# Altium PCB ESC_GEMINI.PcbDoc (part 3 of 4)
Units mm, origin at the board's own origin, x right, y up, seen from the top; angles counter-clockwise.
Board outline 12 x 35 mm, 6 copper layers (F.Cu, In1.Cu, In2.Cu, In3.Cu, In4.Cu, B.Cu); 97 components, 64 nets, 285 pads, 618 vias.
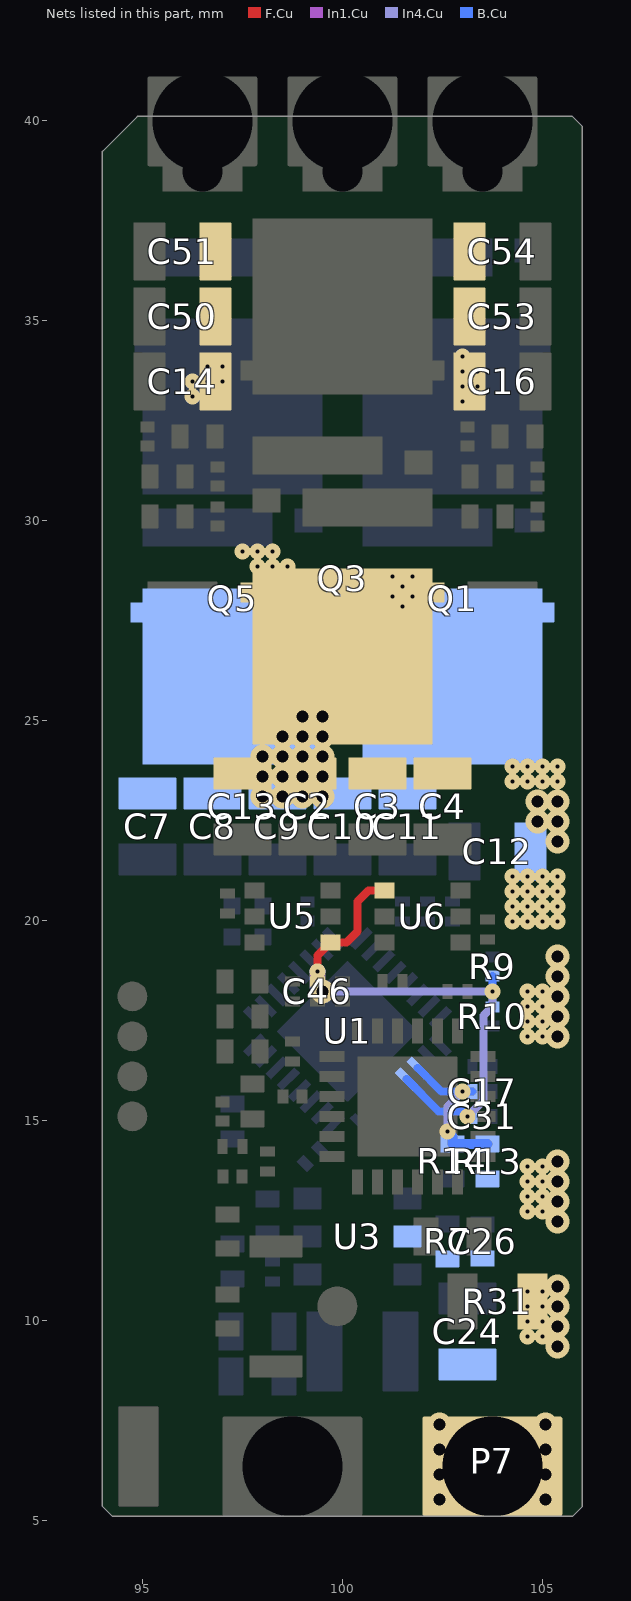
[diagram p7: the nets of this part, all layers, seen from the top]

## Via types
v1: diameter 0.4, hole 0.1, F.Cu to In1.Cu, tented both sides, 195 vias
v2: diameter 0.4, hole 0.1, In4.Cu to B.Cu, tented both sides, 187 vias
v3: diameter 0.6, hole 0.3, In1.Cu to In4.Cu, tented both sides, 159 vias
v4: diameter 0.6, hole 0.3, F.Cu to B.Cu, tented both sides, 77 vias

## Nets (pads, with @x,y where several pads share a name; then routed paths per layer and width w, separated by ;. In a path a pad name is that pad's centre, name@x,y a point inside that pad or via, vN(x,y) a via of type N, cw(c..) or ccw(c..) an arc to the next point about the centre after c; other vN are vias at no path point) (continued)
VBUS: C2.1 C3.1 C4.1 C7.1 C8.1 C9.1 C10.1 C11.1 C12.1 C13.1 C14.1 C16.1 C24.1 C26.1 C50.1 C51.1 C53.1 C54.1 P7.PAD Q1.D Q3.D Q5.D R7.1 R13.1 R31.2 U3.5
  other v1: 101.5,27.85 101.25,28.1 101.75,28.1 101.5,28.35 101.25,28.6 101.75,28.6 97.875,28.85 98.25,28.85 98.625,28.85 97.5,29.225 97.875,29.225 98.25,29.225 103,32.975 96.25,33.1 103,33.35 103.375,33.35 96.25,33.475 96.625,33.475 97,33.475 103,33.725 103.375,33.725 96.625,33.85 97,33.85 103,34.1
  other v2: 104.625,9.6 105,9.6 104.625,9.975 105,9.975 104.625,10.35 105,10.35 104.625,10.725 105,10.725 104.625,12.725 105,12.725 104.625,13.1 105,13.1 104.625,13.475 105,13.475 104.625,13.85 105,13.85 104.625,17.1 105,17.1 104.625,17.475 105,17.475 104.625,17.85 105,17.85 104.625,18.225 105,18.225 104.25,19.975 104.625,19.975 105,19.975 105.375,19.975 104.25,20.35 104.625,20.35 105,20.35 105.375,20.35 104.25,20.725 104.625,20.725 105,20.725 105.375,20.725 104.25,21.1 104.625,21.1 105,21.1 105.375,21.1 104.25,23.475 104.625,23.475 105,23.475 105.375,23.475 104.25,23.85 104.625,23.85 105,23.85 105.375,23.85
  other v3: 105.375,9.35 105.375,9.85 105.375,10.35 105.375,10.85 105.375,12.475 105.375,12.975 105.375,13.475 105.375,13.975 105.375,17.1 105.375,17.6 105.375,18.1 105.375,18.6 105.375,19.1 105.375,21.975 104.875,22.475 105.375,22.475 104.875,22.975 105.375,22.975
  other v4: 102.425,5.525 105.075,5.525 102.425,6.15 105.075,6.15 102.425,6.775 105.075,6.775 102.425,7.4 105.075,7.4 98,23.1 98.5,23.1 99,23.1 99.5,23.1 98,23.6 98.5,23.6 99,23.6 99.5,23.6 98,24.1 98.5,24.1 99,24.1 99.5,24.1 98.5,24.6 99,24.6 99.5,24.6 99,25.1 99.5,25.1
VBUS_SNS_U: C17.1 R13.2 R14.1 U1.11 | length 4
  In4.Cu w0.2: v2(102.625,14.725) 102.625,15.35 v2(103,15.725)
  B.Cu w0.2: U1.11@101.884,16.315 102.474,15.725 C17.1@103.25,15.725
  B.Cu w0.25: v2(102.625,14.725) 102.75,14.6 R14.1@102.75,14.413 R13.2@103.625,14.413
VREF_U: C31.1 C46.1 R9.2 R10.1 U1.12 U5.1 U6.1 | length 14.4
  F.Cu w0.2: C46.1@99.375,18.475 v1(99.375,18.725) 99.375,19.125 U5.1@99.7,19.45 100.1,19.45 100.375,19.725 100.375,20.475 100.65,20.75 U6.1@101.05,20.75
  In1.Cu w0.4: v1(99.375,18.725) 99.375,18.35 v3(99.5,18.225)
  In4.Cu w0.2: v3(99.5,18.225) v2(103.75,18.225) 103.75,17.85 103.525,17.625 103.525,15.5 v2(103.125,15.1)
  B.Cu w0.2: U1.12@101.601,16.032 102.408,15.225 103,15.225 v2(103.125,15.1) C31.1@103.25,15.1 ; R10.1@103.75,17.838 R9.2@103.75,18.613

## Polygon pours and split planes (outlines as drawn)
PHC on F.Cu "F.Cu-/CTRL/PHC-3" (solid, remove dead copper, pour order 30126): 105.5,37.85 105.75,38.1 105.75,39.35 105,40.1 102,40.1 101.875,39.975 101.875,38.1 102.125,37.85
PHA on F.Cu "F.Cu-/CTRL/PHA-2" (solid, remove dead copper, pour order 30113): 94.5,37.85 94.25,38.1 94.25,39.35 95,40.1 98,40.1 98.125,39.975 98.125,38.1 97.875,37.85
VBUS on F.Cu "F.Cu-VBUS-4" (solid, remove dead copper, pour order 30099): 97.875,22.85 99.625,22.85 99.75,22.975 99.75,25.225 99.625,25.35 98.875,25.35 97.75,24.225 97.75,22.975
GND on F.Cu "F.Cu-GND-3" (solid, remove dead copper, pour order 30065): 97.625,32.6 97.75,32.725 100.875,32.725 101.25,32.35 101,32.1 101,31.225 100.875,31.1 97.75,31.1 97.625,31.225
VBUS on F.Cu "F.Cu-VBUS-3" (solid, remove dead copper, pour order 30098): 97.25,37.35 97.125,37.475 96.375,37.475 96.25,37.35 96.25,33.6 96,33.35 96,32.975 96.25,32.725 97.125,32.725 97.25,32.85
PHA on F.Cu "F.Cu-/CTRL/PHA-1" (solid, remove dead copper, pour order 30243): 96.927,30.763 97.009,30.761 97.068,30.755 97.117,30.743 97.173,30.722 97.248,30.69 97.326,30.875 97.248,31.06 97.172,31.025 97.117,30.998 97.068,30.978 97.01,30.966 96.927,30.963
Net-(U4-BG_C) on F.Cu "F.Cu-Net-(U4-BG_C)-1" (solid, remove dead copper, pour order 30273): 103.897,15 103.962,14.992 104.002,14.969 104.032,14.933 104.063,14.887 104.109,14.834 104.251,14.975 104.25,15.175 104.162,15.178 104.1,15.184 104.047,15.191 103.985,15.197 103.897,15.2
Net-(U4-TG_C) on F.Cu "F.Cu-Net-(U4-TG_C)-1" (solid, remove dead copper, pour order 30161): 102.979,17.164 103.031,17.2 103.077,17.201 103.123,17.183 103.179,17.161 103.25,17.15 103.251,17.351 103.173,17.535 103.075,17.498 103.002,17.475 102.941,17.45 102.879,17.41 102.802,17.341
PHC on F.Cu "F.Cu-/CTRL/PHC-2" (solid, remove dead copper, pour order 30226): 103.837,29.329 103.777,29.272 103.729,29.236 103.683,29.213 103.626,29.191 103.548,29.16 103.624,28.974 103.81,28.898 103.841,28.976 103.863,29.033 103.886,29.079 103.922,29.127 103.979,29.187
PHB on F.Cu "F.Cu-/CTRL/PHB-4" (solid, remove dead copper, pour order 30264): 101.975,18.179 101.965,18.278 101.939,18.344 101.902,18.398 101.857,18.46 101.81,18.552 101.625,18.476 101.548,18.29 101.617,18.272 101.679,18.266 101.729,18.258 101.763,18.234 101.775,18.179
Net-(U4-BG_B) on F.Cu "F.Cu-Net-(U4-BG_B)" (solid, remove dead copper, pour order 30202): 103.725,15.5 103.808,15.497 103.867,15.489 103.916,15.473 103.972,15.449 104.048,15.415 104.126,15.6 104.048,15.785 103.972,15.751 103.916,15.727 103.867,15.711 103.808,15.703 103.725,15.7
PHB on F.Cu "F.Cu-/CTRL/PHB-3" (solid, remove dead copper, pour order 30119): 17 vertices, not listed, extent 97.5,33.1 102.5,40.1
VBUS on F.Cu "F.Cu-VBUS-2" (solid, remove dead copper, pour order 30097): 102,5.1 105.625,5.1 105.75,5.225 105.75,11.1 105.625,11.225 104.5,11.225 104.375,11.1 104.375,9.1 103,7.725 102.125,7.725 101.75,7.35 101.75,5.35
PWM-CN on F.Cu "F.Cu-/CTRL/PWM-CN" (solid, remove dead copper, pour order 30206): 101.275,13.125 101.272,13.042 101.264,12.983 101.248,12.934 101.224,12.878 101.19,12.802 101.375,12.724 101.56,12.802 101.526,12.878 101.502,12.934 101.486,12.983 101.478,13.042 101.475,13.125
Net-(Q6-Gate) on F.Cu "F.Cu-Net-(Q6-Gate)-2" (solid, remove dead copper, pour order 30198): 95.93,32.284 95.865,32.34 95.811,32.371 95.762,32.394 95.708,32.425 95.643,32.481 95.5,32.34 95.501,32.139 95.568,32.145 95.619,32.154 95.663,32.157 95.705,32.145 95.754,32.107
Net-(Q2-Gate) on F.Cu "F.Cu-Net-(Q2-Gate)-1" (solid, remove dead copper, pour order 30131): 104.775,30.988 104.675,30.995 104.605,31.014 104.545,31.036 104.475,31.055 104.375,31.063 104.374,30.863 104.375,30.663 104.475,30.67 104.545,30.689 104.605,30.711 104.675,30.73 104.775,30.738
VREF_U on F.Cu "F.Cu-/CTRL/VREF_U-1" (solid, remove dead copper, pour order 30214): 99.275,19.125 99.272,19.042 99.264,18.983 99.248,18.934 99.224,18.878 99.19,18.802 99.375,18.724 99.56,18.802 99.526,18.878 99.502,18.934 99.486,18.983 99.478,19.042 99.475,19.125
PHB on F.Cu "F.Cu-/CTRL/PHB-2" (solid, remove dead copper, pour order 30291): 97.938,17.5 97.984,17.503 98.017,17.509 98.045,17.516 98.078,17.522 98.125,17.525 98.126,17.725 97.925,17.725 97.928,17.717 97.933,17.71 97.939,17.705 97.942,17.701 97.938,17.7
Net-(U4-BG_C) on F.Cu "F.Cu-Net-(U4-BG_C)" (solid, remove dead copper, pour order 30146): 103.045,31.225 102.945,31.233 102.876,31.25 102.816,31.272 102.746,31.29 102.646,31.297 102.645,31.097 102.646,30.897 102.746,30.905 102.816,30.925 102.876,30.948 102.945,30.967 103.045,30.975
GND on F.Cu "F.Cu-GND-2" (solid, remove dead copper, pour order 30064): 21 vertices, not listed, extent 94.25,5.1 105.75,25.61
Net-(U4-BG_A) on F.Cu "F.Cu-Net-(U4-BG_A)-1" (solid, remove dead copper, pour order 30270): 103.897,16 103.985,16.003 104.047,16.009 104.1,16.016 104.162,16.022 104.25,16.025 104.251,16.225 104.109,16.366 104.063,16.313 104.032,16.267 104.002,16.231 103.962,16.208 103.897,16.2
VREF_U on F.Cu "F.Cu-/CTRL/VREF_U" (solid, remove dead copper, pour order 30282): 99.475,18.475 99.48,18.522 99.494,18.552 99.514,18.577 99.537,18.605 99.56,18.648 99.375,18.726 99.19,18.648 99.213,18.605 99.236,18.577 99.256,18.552 99.27,18.522 99.275,18.475
+3V3 on F.Cu "F.Cu-+3V3-4" (solid, remove dead copper, pour order 30285): 100.1,18.475 100.105,18.522 100.119,18.552 100.139,18.577 100.162,18.605 100.185,18.648 100,18.726 99.815,18.648 99.838,18.605 99.861,18.577 99.881,18.552 99.895,18.522 99.9,18.475
VBUS on F.Cu "F.Cu-VBUS-1" (solid, remove dead copper, pour order 30096): 17 vertices, not listed, extent 96.75,22.85 103.25,29.475
GND_A on F.Cu "F.Cu-/GND_A-2" (solid, remove dead copper, pour order 30073): 94.5,27.1 94.25,27.35 94.25,37.35 94.5,37.6 95.5,37.6 95.75,37.35 95.75,29.85 97.125,28.475 97.125,27.35 96.875,27.1
PWM-AP on F.Cu "F.Cu-/CTRL/PWM-AP" (solid, remove dead copper, pour order 30252): 99.046,15.2 98.947,15.19 98.881,15.164 98.827,15.127 98.765,15.082 98.673,15.035 98.749,14.85 98.935,14.773 98.953,14.842 98.959,14.904 98.967,14.954 98.991,14.988 99.046,15
Net-(U4-TG_C) on F.Cu "F.Cu-Net-(U4-TG_C)" (solid, remove dead copper, pour order 30166): 102.973,29.438 102.908,29.359 102.877,29.294 102.863,29.228 102.848,29.152 102.815,29.052 102.999,28.974 103.2,28.975 103.185,29.051 103.153,29.109 103.123,29.158 103.116,29.206 103.15,29.261
+3V3 on F.Cu "F.Cu-+3V3-3" (solid, remove dead copper, pour order 30103): 96.75,9.975 96.75,9.475 97.75,8.475 98.875,8.475 99,8.6 99,9.225 98.875,9.35 98.125,9.35 97.375,10.1 96.875,10.1
GND_A on F.Cu "F.Cu-/GND_A-1" (solid, remove dead copper, pour order 30190): 97.078,20.775 97.013,20.788 96.979,20.822 96.959,20.872 96.936,20.93 96.891,20.991 96.749,20.85 96.673,20.665 96.769,20.625 96.839,20.599 96.901,20.584 96.974,20.577 97.078,20.575
PHB on F.Cu "F.Cu-/CTRL/PHB-1" (solid, remove dead copper, pour order 30118): 99,29.85 99.5,29.35 101.75,29.35 102.25,29.85 102.25,30.85 102.125,30.975 99.125,30.975 99,30.85
Net-(Q6-Gate) on F.Cu "F.Cu-Net-(Q6-Gate)-1" (solid, remove dead copper, pour order 30176): 95.149,32.463 95.136,32.474 95.222,32.5 95.343,32.526 95.432,32.538 95.425,32.524 95.5,32.339 95.425,32.154 95.432,32.14 95.343,32.152 95.222,32.177 95.136,32.201 95.149,32.213
Net-(Q1-Gate) on F.Cu "F.Cu-Net-(Q1-Gate)-1" (solid, remove dead copper, pour order 30288): 104.151,30.012 104.17,30.027 104.187,30.032 104.204,30.03 104.224,30.027 104.25,30.025 104.251,30.226 104.109,30.366 104.072,30.325 104.05,30.292 104.033,30.262 104.011,30.23 103.974,30.188
Net-(Q1-Gate) on F.Cu "F.Cu-Net-(Q1-Gate)" (solid, remove dead copper, pour order 30181): 104.611,30.463 104.521,30.459 104.458,30.449 104.403,30.438 104.34,30.429 104.25,30.425 104.249,30.225 104.327,30.04 104.399,30.083 104.445,30.128 104.483,30.17 104.532,30.201 104.611,30.212
+3V3 on F.Cu "F.Cu-+3V3-2" (solid, remove dead copper, pour order 30255): 100.296,19.075 100.197,19.065 100.131,19.039 100.077,19.002 100.015,18.957 99.923,18.91 99.999,18.725 100.185,18.648 100.203,18.717 100.209,18.779 100.217,18.829 100.241,18.863 100.296,18.875
+6V on F.Cu "F.Cu-+6V" (solid, remove dead copper, pour order 30104): 27 vertices, not listed, extent 96.75,9.475 102.5,13.725
Net-(Q5-Gate) on F.Cu "F.Cu-Net-(Q5-Gate)" (solid, remove dead copper, pour order 30194): 96.892,31.213 96.981,31.219 97.044,31.235 97.098,31.253 97.16,31.268 97.25,31.275 97.251,31.475 97.109,31.616 97.063,31.564 97.03,31.522 96.998,31.49 96.956,31.469 96.892,31.462
BEMF_U on F.Cu "F.Cu-/CTRL/BEMF_U" (solid, remove dead copper, pour order 30210): 97.6,13.5 97.683,13.497 97.742,13.489 97.791,13.473 97.847,13.449 97.923,13.415 98.001,13.6 97.923,13.785 97.847,13.751 97.791,13.727 97.742,13.711 97.683,13.703 97.6,13.7
PWM-BN on F.Cu "F.Cu-/CTRL/PWM-BN" (solid, remove dead copper, pour order 30258): 100.775,13.021 100.763,12.966 100.729,12.942 100.679,12.934 100.617,12.928 100.548,12.91 100.625,12.724 100.81,12.648 100.857,12.74 100.902,12.802 100.939,12.856 100.965,12.922 100.975,13.021
I_SNS_B on F.Cu "F.Cu-/CTRL/I_SNS_B" (solid, remove dead copper, pour order 30249): 104.079,18.75 104.134,18.738 104.158,18.704 104.166,18.654 104.172,18.592 104.19,18.523 104.376,18.6 104.452,18.785 104.36,18.832 104.298,18.877 104.244,18.914 104.178,18.94 104.079,18.95
PHC on F.Cu "F.Cu-/CTRL/PHC-1" (solid, remove dead copper, pour order 30279): 97.938,18.575 97.857,18.572 97.8,18.561 97.752,18.544 97.698,18.518 97.623,18.485 97.699,18.3 97.885,18.223 97.894,18.268 97.893,18.309 97.893,18.343 97.904,18.366 97.938,18.375
GND on F.Cu "F.Cu-GND-1" (solid, remove dead copper, pour order 30218): 96.163,25.996 96.223,26.053 96.271,26.089 96.317,26.112 96.374,26.134 96.452,26.165 96.376,26.351 96.19,26.427 96.159,26.349 96.137,26.292 96.114,26.246 96.078,26.198 96.021,26.138
GND_C on F.Cu "F.Cu-/GND_C-2" (solid, remove dead copper, pour order 30222): 104.163,19.496 104.223,19.553 104.271,19.589 104.317,19.612 104.374,19.634 104.452,19.665 104.376,19.851 104.19,19.927 104.159,19.849 104.137,19.792 104.114,19.746 104.078,19.698 104.021,19.638
PHB on F.Cu "F.Cu-/CTRL/PHB" (solid, remove dead copper, pour order 30237): 96.275,29.45 96.192,29.453 96.133,29.461 96.084,29.477 96.028,29.501 95.952,29.535 95.874,29.35 95.952,29.165 96.028,29.199 96.084,29.223 96.133,29.239 96.192,29.247 96.275,29.25
Net-(U4-TG_B) on F.Cu "F.Cu-Net-(U4-TG_B)" (solid, remove dead copper, pour order 30240): 101.475,17.45 101.478,17.533 101.486,17.592 101.502,17.641 101.526,17.697 101.56,17.773 101.375,17.851 101.19,17.773 101.224,17.697 101.248,17.641 101.264,17.592 101.272,17.533 101.275,17.45
PHA on F.Cu "F.Cu-/CTRL/PHA" (solid, remove dead copper, pour order 30267): 99.888,17.125 99.955,17.117 99.997,17.095 100.029,17.059 100.061,17.013 100.109,16.959 100.251,17.1 100.25,17.3 100.16,17.303 100.097,17.309 100.042,17.316 99.978,17.322 99.888,17.325
GND on F.Cu "F.Cu-GND" (solid, remove dead copper, pour order 30234): 103.979,26.263 103.922,26.323 103.886,26.371 103.863,26.417 103.841,26.474 103.81,26.552 103.624,26.476 103.548,26.29 103.626,26.259 103.683,26.237 103.729,26.214 103.777,26.178 103.837,26.121
+3V3 on F.Cu "F.Cu-+3V3-1" (solid, remove dead copper, pour order 30141): 98.379,19.294 98.444,19.218 98.48,19.156 98.507,19.098 98.543,19.035 98.609,18.959 98.751,19.099 98.891,19.241 98.815,19.307 98.752,19.343 98.694,19.37 98.632,19.406 98.556,19.471
VBUS on F.Cu "F.Cu-VBUS" (solid, remove dead copper, pour order 30095): 102.75,37.35 103,37.6 103.5,37.6 103.75,37.35 103.75,32.85 103.625,32.725 102.875,32.725 102.75,32.85
PHC on F.Cu "F.Cu-/CTRL/PHC" (solid, remove dead copper, pour order 30186): 103.633,17.125 103.566,17.059 103.517,17.015 103.474,16.977 103.426,16.932 103.359,16.866 103.499,16.724 103.685,16.648 103.708,16.733 103.71,16.8 103.709,16.859 103.725,16.917 103.775,16.983
GND_C on F.Cu "F.Cu-/GND_C-1" (solid, remove dead copper, pour order 30246): 103.9,26.896 103.91,26.797 103.936,26.731 103.973,26.677 104.018,26.615 104.065,26.523 104.25,26.599 104.327,26.785 104.258,26.803 104.196,26.809 104.146,26.817 104.112,26.841 104.1,26.896
I_SNS_A on F.Cu "F.Cu-/CTRL/I_SNS_A" (solid, remove dead copper, pour order 30156): 97.588,19.575 97.527,19.584 97.489,19.607 97.463,19.644 97.434,19.689 97.391,19.741 97.249,19.6 97.173,19.415 97.271,19.375 97.343,19.348 97.407,19.333 97.482,19.327 97.588,19.325
Net-(Q6-Gate) on F.Cu "F.Cu-Net-(Q6-Gate)" (solid, remove dead copper, pour order 30171): 95.149,32.463 95.136,32.474 95.222,32.5 95.343,32.526 95.432,32.538 95.425,32.524 95.5,32.339 95.425,32.154 95.432,32.14 95.343,32.152 95.222,32.177 95.136,32.201 95.149,32.213
PWM-BP on F.Cu "F.Cu-/CTRL/PWM-BP" (solid, remove dead copper, pour order 30230): 99.087,14.579 99.027,14.522 98.979,14.486 98.933,14.463 98.876,14.441 98.798,14.41 98.874,14.224 99.06,14.148 99.091,14.226 99.113,14.283 99.136,14.329 99.172,14.377 99.229,14.437
Net-(U4-BG_A) on F.Cu "F.Cu-Net-(U4-BG_A)" (solid, remove dead copper, pour order 30276): 96.812,31.975 96.873,31.973 96.916,31.967 96.952,31.956 96.992,31.939 97.048,31.915 97.126,32.1 97.048,32.285 96.992,32.261 96.952,32.244 96.916,32.233 96.873,32.227 96.812,32.225
GND_A on F.Cu "F.Cu-/GND_A" (solid, remove dead copper, pour order 30261): 95.9,26.771 95.888,26.716 95.854,26.692 95.804,26.684 95.742,26.678 95.673,26.66 95.75,26.474 95.935,26.398 95.982,26.49 96.027,26.552 96.064,26.606 96.09,26.672 96.1,26.771
Net-(Q2-Gate) on F.Cu "F.Cu-Net-(Q2-Gate)" (solid, remove dead copper, pour order 30151): 103.974,31.012 104.041,30.942 104.085,30.89 104.122,30.843 104.167,30.791 104.234,30.721 104.376,30.862 104.452,31.047 104.373,31.075 104.313,31.091 104.263,31.106 104.213,31.135 104.151,31.188
GND_C on F.Cu "F.Cu-/GND_C" (solid, remove dead copper, pour order 30081): 105.375,27.35 105.75,27.725 105.75,37.35 105.5,37.6 104.375,37.6 104.125,37.35 104.125,29.725 103,28.6 103,27.725 103.375,27.35
+3V3 on F.Cu "F.Cu-+3V3" (solid, remove dead copper, pour order 30136): 98.875,18.7 98.883,18.8 98.901,18.87 98.924,18.93 98.942,19 98.95,19.1 98.75,19.101 98.55,19.1 98.558,19 98.576,18.93 98.599,18.87 98.617,18.8 98.625,18.7
VBUS on In1.Cu "In1.Cu-VBUS-3" (solid, remove dead copper, pour order 30094): 101.75,5.35 102,5.1 105.5,5.1 105.75,5.35 105.75,23.1 105.5,23.35 103.75,23.35 103.5,23.1 103.5,9.1 101.75,7.35
GND on In1.Cu "In1.Cu-GND" (solid, remove dead copper, pour order 30314): 94.25,5.475 94.5,5.225 105.625,5.225 105.75,5.35 105.75,37.35 105.5,37.6 94.5,37.6 94.25,37.35
PHA on In1.Cu "In1.Cu-/CTRL/PHA-4" (solid, remove dead copper, pour order 30112): 98.125,39.975 98,40.1 95,40.1 94.25,39.35 94.25,36.725 94.5,36.475 95.75,36.475 96.125,36.1 96.125,35.1 96.375,34.85 97.125,34.85 98.125,35.85
GND_A on In1.Cu "In1.Cu-/GND_A-2" (solid, remove dead copper, pour order 30297): 95.927,26.19 95.89,26.244 95.891,26.293 95.913,26.342 95.938,26.4 95.95,26.475 95.749,26.476 95.565,26.398 95.604,26.303 95.635,26.235 95.667,26.18 95.714,26.122 95.785,26.048
PHA on In1.Cu "In1.Cu-/CTRL/PHA-3" (solid, remove dead copper, pour order 30155): 98.438,29.964 98.341,30.073 98.284,30.161 98.241,30.241 98.184,30.328 98.087,30.437 97.874,30.226 97.76,29.948 97.888,29.91 97.988,29.901 98.074,29.895 98.161,29.866 98.261,29.787
PWM-BN on In1.Cu "In1.Cu-/CTRL/PWM-BN-1" (solid, remove dead copper, pour order 30217): 100.771,12.98 100.867,13.063 100.946,13.107 101.024,13.131 101.117,13.155 101.24,13.198 101.126,13.476 100.848,13.59 100.805,13.467 100.781,13.374 100.757,13.296 100.713,13.217 100.63,13.121
+3V3 on In1.Cu "In1.Cu-+3V3-4" (solid, remove dead copper, pour order 30254): 97.305,9.275 97.351,9.334 97.195,9.467 96.964,9.607 96.786,9.686 96.788,9.638 97.001,9.85 97.3,9.85 97.309,9.865 97.327,9.826 97.341,9.762 97.338,9.702 97.305,9.675
PWM-BP on In1.Cu "In1.Cu-/CTRL/PWM-BP-1" (solid, remove dead copper, pour order 30310): 99.087,14.579 99.027,14.522 98.979,14.486 98.933,14.463 98.876,14.441 98.798,14.41 98.874,14.224 99.06,14.148 99.091,14.226 99.113,14.283 99.136,14.329 99.172,14.377 99.229,14.437
PWM_IN-P on In1.Cu "In1.Cu-/CTRL/PWM_IN-P-1" (solid, remove dead copper, pour order 30185): 94.75,7.75 94.756,7.876 94.776,7.963 94.807,8.036 94.849,8.119 94.902,8.235 94.625,8.351 94.348,8.235 94.401,8.119 94.443,8.036 94.474,7.963 94.494,7.876 94.5,7.75
I_SNS_A on In1.Cu "In1.Cu-/CTRL/I_SNS_A-1" (solid, remove dead copper, pour order 30145): 99.428,20.354 99.507,20.255 99.539,20.17 99.548,20.085 99.559,19.987 99.598,19.86 99.876,19.974 100.087,20.187 99.977,20.283 99.887,20.338 99.804,20.38 99.715,20.435 99.604,20.531
PHC on In1.Cu "In1.Cu-/CTRL/PHC-5" (solid, remove dead copper, pour order 30125): 105.75,39.85 105.75,35.975 105.5,35.725 103.75,35.725 103,34.975 102.25,34.975 102.125,35.1 102.125,36.225 101.875,36.475 101.875,39.975 102,40.1 105.5,40.1
PWM-CP on In1.Cu "In1.Cu-/CTRL/PWM-CP-1" (solid, remove dead copper, pour order 30307): 99.413,13.621 99.473,13.678 99.521,13.714 99.567,13.737 99.624,13.759 99.702,13.79 99.626,13.976 99.44,14.052 99.409,13.974 99.387,13.917 99.364,13.871 99.328,13.823 99.271,13.763
PWM-BP on In1.Cu "In1.Cu-/CTRL/PWM-BP" (solid, remove dead copper, pour order 30170): 99.221,14.43 99.333,14.525 99.424,14.577 99.509,14.615 99.601,14.668 99.712,14.763 99.501,14.976 99.223,15.09 99.187,14.959 99.183,14.855 99.183,14.764 99.158,14.674 99.08,14.571
Net-(U4-BG_C) on In1.Cu "In1.Cu-Net-(U4-BG_C)-1" (solid, remove dead copper, pour order 30245): 104.109,14.834 104.15,14.787 104.173,14.75 104.187,14.713 104.201,14.669 104.223,14.61 104.501,14.724 104.615,15.002 104.556,15.024 104.512,15.038 104.475,15.052 104.438,15.075 104.391,15.116
PWM_IN-P on In1.Cu "In1.Cu-/CTRL/PWM_IN-P" (solid, remove dead copper, pour order 30101): 94.5,5.35 95.25,5.35 95.375,5.475 95.375,7.725 95.25,7.85 94.5,7.85 94.375,7.725 94.375,5.475
PWM-AN on In1.Cu "In1.Cu-/CTRL/PWM-AN-1" (solid, remove dead copper, pour order 30229): 99.946,13.222 99.866,13.129 99.821,13.053 99.788,12.982 99.743,12.906 99.663,12.812 99.874,12.599 100.175,12.6 100.154,12.717 100.111,12.808 100.072,12.885 100.067,12.96 100.122,13.046
Net-(U4-TG_A) on In1.Cu "In1.Cu-Net-(U4-TG_A)-1" (solid, remove dead copper, pour order 30305): 99.5,17.077 99.505,16.989 99.518,16.928 99.532,16.875 99.545,16.813 99.55,16.725 99.75,16.724 99.891,16.866 99.842,16.911 99.803,16.943 99.774,16.974 99.756,17.015 99.75,17.077
GND_A on In1.Cu "In1.Cu-/GND_A-1" (solid, remove dead copper, pour order 30299): 96.75,21.219 96.737,21.138 96.704,21.087 96.659,21.049 96.61,21.002 96.565,20.927 96.75,20.849 96.95,20.85 96.95,20.942 96.95,21.006 96.95,21.063 96.95,21.128 96.95,21.219
Net-(Q6-Gate) on In1.Cu "In1.Cu-Net-(Q6-Gate)-1" (solid, remove dead copper, pour order 30180): 97.539,34.587 97.632,34.672 97.708,34.72 97.781,34.75 97.87,34.778 97.99,34.823 97.876,35.101 97.598,35.215 97.553,35.095 97.525,35.006 97.495,34.933 97.447,34.857 97.362,34.764
GND_A on In1.Cu "In1.Cu-/GND_A" (solid, remove dead copper, pour order 30072): 96,35.975 96,34.6 95.125,33.725 95.125,28.85 96.375,27.6 96.375,27.1 96.25,26.975 95.625,26.975 94.75,26.1 94.5,26.1 94.25,26.35 94.25,37.1 94.5,37.35 94.625,37.35
PHA on In1.Cu "In1.Cu-/CTRL/PHA-2" (solid, remove dead copper, pour order 30165): 97.455,30.629 97.533,30.526 97.558,30.436 97.558,30.345 97.562,30.241 97.598,30.11 97.876,30.224 98.087,30.437 97.976,30.532 97.884,30.585 97.799,30.623 97.708,30.675 97.596,30.77
PHB on In1.Cu "In1.Cu-/CTRL/PHB-4" (solid, remove dead copper, pour order 30248): 97.984,17.866 97.937,17.825 97.9,17.802 97.863,17.788 97.819,17.774 97.76,17.752 97.874,17.474 98.152,17.36 98.174,17.419 98.188,17.463 98.202,17.5 98.225,17.537 98.266,17.584
I_SNS_B on In1.Cu "In1.Cu-/CTRL/I_SNS_B" (solid, remove dead copper, pour order 30140): 104.575,18.6 104.588,18.704 104.622,18.772 104.67,18.825 104.724,18.889 104.777,18.985 104.5,19.101 104.2,19.1 104.197,18.976 104.191,18.888 104.184,18.812 104.178,18.724 104.175,18.6
Net-(Q5-Gate) on In1.Cu "In1.Cu-Net-(Q5-Gate)-1" (solid, remove dead copper, pour order 30209): 98.158,30.765 98.252,30.672 98.319,30.605 98.377,30.548 98.444,30.482 98.538,30.388 98.751,30.599 98.75,30.9 98.641,30.89 98.556,30.872 98.484,30.864 98.414,30.881 98.335,30.942
GND_C on In1.Cu "In1.Cu-/GND_C-2" (solid, remove dead copper, pour order 30080): 105.75,35.975 105.75,27.6 105.5,27.35 103.625,27.35 103.5,27.475 103.5,28.475 104.5,29.475 104.5,33.975 104,34.475 104,35.35 104.875,36.225 105.5,36.225
PHA on In1.Cu "In1.Cu-/CTRL/PHA-1" (solid, remove dead copper, pour order 30278): 100.621,16.906 100.556,16.982 100.52,17.044 100.493,17.102 100.457,17.165 100.391,17.241 100.249,17.101 100.109,16.959 100.185,16.893 100.248,16.857 100.306,16.83 100.368,16.794 100.444,16.729
VREF_U on In1.Cu "In1.Cu-/CTRL/VREF_U" (solid, remove dead copper, pour order 30135): 99.175,18.725 99.178,18.601 99.184,18.513 99.191,18.437 99.197,18.349 99.2,18.225 99.5,18.224 99.777,18.34 99.724,18.436 99.67,18.5 99.622,18.553 99.588,18.621 99.575,18.725
+3V3 on In1.Cu "In1.Cu-+3V3-3" (solid, remove dead copper, pour order 30225): 97.245,9.675 97.216,9.684 97.225,9.71 97.254,9.749 97.285,9.797 97.3,9.85 96.999,9.85 96.788,9.638 96.887,9.521 96.954,9.421 97.017,9.343 97.105,9.293 97.245,9.275
Net-(U4-TG_B) on In1.Cu "In1.Cu-Net-(U4-TG_B)-1" (solid, remove dead copper, pour order 30284): 100.958,17.966 101.025,17.9 101.074,17.856 101.117,17.818 101.166,17.774 101.234,17.709 101.376,17.849 101.452,18.035 101.371,18.059 101.307,18.066 101.253,18.072 101.198,18.092 101.134,18.142
PHB on In1.Cu "In1.Cu-/CTRL/PHB-3" (solid, remove dead copper, pour order 30281): 96.246,29.156 96.181,29.232 96.145,29.294 96.118,29.352 96.082,29.415 96.016,29.491 95.874,29.351 95.734,29.209 95.81,29.143 95.873,29.107 95.931,29.08 95.993,29.044 96.069,28.979
+3V3 on In1.Cu "In1.Cu-+3V3-2" (solid, remove dead copper, pour order 30213): 99.763,19.389 99.666,19.473 99.587,19.52 99.514,19.556 99.434,19.603 99.337,19.687 99.124,19.476 99.125,19.175 99.246,19.195 99.34,19.235 99.42,19.27 99.498,19.271 99.586,19.212
PHB on In1.Cu "In1.Cu-/CTRL/PHB-2" (solid, remove dead copper, pour order 30117): 17 vertices, not listed, extent 98.375,29.35 102.375,40.1
PWM-AP on In1.Cu "In1.Cu-/CTRL/PWM-AP" (solid, remove dead copper, pour order 30251): 98.891,14.991 98.85,15.038 98.827,15.075 98.813,15.112 98.799,15.156 98.777,15.215 98.499,15.101 98.385,14.823 98.444,14.801 98.488,14.787 98.525,14.773 98.562,14.75 98.609,14.709
PWM-CN on In1.Cu "In1.Cu-/CTRL/PWM-CN-1" (solid, remove dead copper, pour order 30221): 101.646,12.855 101.742,12.938 101.821,12.982 101.899,13.006 101.992,13.03 102.115,13.073 102.001,13.351 101.723,13.465 101.68,13.342 101.656,13.249 101.632,13.171 101.588,13.092 101.505,12.996
BEMF_U on In1.Cu "In1.Cu-/CTRL/BEMF_U" (solid, remove dead copper, pour order 30236): 98,13.8 97.949,13.807 97.918,13.827 97.896,13.856 97.873,13.894 97.837,13.937 97.624,13.725 97.625,13.425 97.718,13.422 97.784,13.416 97.841,13.409 97.907,13.403 98,13.4
Net-(U4-TG_A) on In1.Cu "In1.Cu-Net-(U4-TG_A)" (solid, remove dead copper, pour order 30293): 95.444,30.707 95.409,30.759 95.406,30.804 95.421,30.85 95.44,30.905 95.45,30.975 95.249,30.976 95.065,30.898 95.103,30.8 95.128,30.728 95.155,30.668 95.197,30.607 95.268,30.531
PWM-AN on In1.Cu "In1.Cu-/CTRL/PWM-AN" (solid, remove dead copper, pour order 30269): 100.056,12.979 100.132,13.044 100.194,13.08 100.252,13.107 100.315,13.143 100.391,13.209 100.251,13.351 100.109,13.491 100.043,13.415 100.007,13.352 99.98,13.294 99.944,13.232 99.879,13.156
Net-(U4-TG_C) on In1.Cu "In1.Cu-Net-(U4-TG_C)-1" (solid, remove dead copper, pour order 30266): 102.806,28.604 102.882,28.669 102.944,28.705 103.002,28.732 103.065,28.768 103.141,28.834 103.001,28.976 102.859,29.116 102.793,29.04 102.757,28.977 102.73,28.919 102.694,28.857 102.629,28.781
PHC on In1.Cu "In1.Cu-/CTRL/PHC-4" (solid, remove dead copper, pour order 30160): 103.75,28.905 103.769,29.031 103.818,29.109 103.886,29.17 103.959,29.244 104.027,29.36 103.75,29.476 103.45,29.475 103.455,29.333 103.468,29.233 103.482,29.147 103.495,29.046 103.5,28.905
VBUS on In1.Cu "In1.Cu-VBUS-2" (solid, remove dead copper, pour order 30093): 17 vertices, not listed, extent 95.625,28.6 98.875,34.1
Net-(Q2-Gate) on In1.Cu "In1.Cu-Net-(Q2-Gate)-1" (solid, remove dead copper, pour order 30304): 104.26,31.163 104.289,31.118 104.284,31.08 104.258,31.041 104.223,30.996 104.19,30.939 104.376,30.862 104.56,30.939 104.53,31.041 104.525,31.121 104.521,31.191 104.499,31.26 104.437,31.34
Net-(U4-BG_B) on In1.Cu "In1.Cu-Net-(U4-BG_B)-1" (solid, remove dead copper, pour order 30189): 104.125,15.4 104.223,15.399 104.293,15.394 104.353,15.382 104.419,15.36 104.51,15.323 104.626,15.6 104.51,15.877 104.419,15.84 104.353,15.818 104.293,15.806 104.223,15.801 104.125,15.8
Net-(Q1-Gate) on In1.Cu "In1.Cu-Net-(Q1-Gate)" (solid, remove dead copper, pour order 30193): 104.25,30.025 104.348,30.024 104.418,30.019 104.478,30.007 104.544,29.985 104.635,29.948 104.751,30.225 104.635,30.502 104.544,30.465 104.478,30.443 104.418,30.431 104.348,30.426 104.25,30.425
PHC on In1.Cu "In1.Cu-/CTRL/PHC-3" (solid, remove dead copper, pour order 30306): 103.1,16.625 103.183,16.622 103.242,16.614 103.291,16.598 103.347,16.574 103.423,16.54 103.501,16.725 103.423,16.91 103.347,16.876 103.291,16.852 103.242,16.836 103.183,16.828 103.1,16.825
PHC on In1.Cu "In1.Cu-/CTRL/PHC-2" (solid, remove dead copper, pour order 30309): 97.488,17.946 97.548,18.003 97.596,18.039 97.642,18.062 97.699,18.084 97.777,18.115 97.701,18.301 97.515,18.377 97.484,18.299 97.462,18.242 97.439,18.196 97.403,18.148 97.346,18.088
+3V3 on In1.Cu "In1.Cu-+3V3-1" (solid, remove dead copper, pour order 30290): 99.806,18.993 99.841,18.941 99.844,18.896 99.829,18.85 99.81,18.795 99.8,18.725 100.001,18.724 100.185,18.802 100.147,18.9 100.122,18.972 100.095,19.032 100.053,19.093 99.982,19.169
Net-(U4-BG_A) on In1.Cu "In1.Cu-Net-(U4-BG_A)-2" (solid, remove dead copper, pour order 30301): 103.946,16.119 103.991,16.148 104.031,16.141 104.07,16.112 104.115,16.074 104.173,16.04 104.251,16.226 104.173,16.41 104.071,16.381 103.99,16.378 103.92,16.377 103.849,16.357 103.769,16.296
GND_C on In1.Cu "In1.Cu-/GND_C-1" (solid, remove dead copper, pour order 30311): 104.303,26.137 104.365,26.214 104.389,26.281 104.396,26.347 104.405,26.425 104.435,26.523 104.251,26.601 104.065,26.523 104.104,26.46 104.148,26.411 104.182,26.37 104.192,26.328 104.162,26.278
PHC on In1.Cu "In1.Cu-/CTRL/PHC-1" (solid, remove dead copper, pour order 30287): 103.509,28.558 103.575,28.625 103.619,28.674 103.657,28.717 103.701,28.766 103.766,28.834 103.626,28.976 103.44,29.052 103.416,28.971 103.409,28.907 103.403,28.853 103.383,28.798 103.333,28.734
PWM-CP on In1.Cu "In1.Cu-/CTRL/PWM-CP" (solid, remove dead copper, pour order 30233): 99.213,13.705 99.124,13.648 99.046,13.658 98.967,13.703 98.872,13.752 98.75,13.775 98.749,13.474 98.962,13.263 99.053,13.344 99.126,13.394 99.191,13.432 99.264,13.482 99.355,13.563
Net-(Q6-Gate) on In1.Cu "In1.Cu-Net-(Q6-Gate)" (solid, remove dead copper, pour order 30257): 95.376,32.739 95.368,32.639 95.35,32.569 95.327,32.509 95.309,32.439 95.301,32.339 95.501,32.338 95.701,32.339 95.693,32.439 95.675,32.509 95.652,32.569 95.634,32.639 95.626,32.739
VBUS on In1.Cu "In1.Cu-VBUS-1" (solid, remove dead copper, pour order 30092): 104,33.475 104,30.35 102.125,28.475 102.125,27.85 101.875,27.6 101.25,27.6 101,27.85 101,28.725 102.625,30.35 102.625,34.1 102.875,34.35 103.125,34.35
Net-(U4-BG_A) on In1.Cu "In1.Cu-Net-(U4-BG_A)-1" (solid, remove dead copper, pour order 30175): 103.5,14.325 103.494,14.199 103.474,14.112 103.443,14.039 103.401,13.956 103.348,13.84 103.625,13.724 103.902,13.84 103.849,13.956 103.807,14.039 103.776,14.112 103.756,14.199 103.75,14.325
PWM-BN on In1.Cu "In1.Cu-/CTRL/PWM-BN" (solid, remove dead copper, pour order 30295): 100.66,13.152 100.589,13.078 100.542,13.02 100.51,12.965 100.479,12.897 100.44,12.802 100.624,12.724 100.825,12.725 100.813,12.8 100.788,12.858 100.766,12.907 100.765,12.956 100.802,13.01
Net-(Q2-Gate) on In1.Cu "In1.Cu-Net-(Q2-Gate)" (solid, remove dead copper, pour order 30150): 104.489,36.037 104.598,36.134 104.686,36.191 104.766,36.234 104.853,36.291 104.962,36.388 104.751,36.601 104.473,36.715 104.435,36.587 104.426,36.487 104.42,36.401 104.391,36.314 104.312,36.214
PHB on In1.Cu "In1.Cu-/CTRL/PHB-1" (solid, remove dead copper, pour order 30201): 101.766,18.616 101.698,18.686 101.653,18.738 101.62,18.788 101.589,18.851 101.552,18.94 101.274,18.826 101.16,18.548 101.249,18.511 101.312,18.48 101.362,18.447 101.414,18.402 101.484,18.334
PWM-CN on In1.Cu "In1.Cu-/CTRL/PWM-CN" (solid, remove dead copper, pour order 30308): 101.587,13.079 101.527,13.022 101.479,12.986 101.433,12.963 101.376,12.941 101.298,12.91 101.374,12.724 101.56,12.648 101.591,12.726 101.613,12.783 101.636,12.829 101.672,12.877 101.729,12.937
PHA on In1.Cu "In1.Cu-/CTRL/PHA" (solid, remove dead copper, pour order 30312): 97.689,30.678 97.632,30.736 97.594,30.781 97.566,30.823 97.541,30.876 97.51,30.952 97.324,30.876 97.248,30.69 97.328,30.661 97.386,30.643 97.435,30.623 97.485,30.592 97.547,30.536
GND_C on In1.Cu "In1.Cu-/GND_C" (solid, remove dead copper, pour order 30313): 104.4,20.202 104.392,20.138 104.369,20.097 104.333,20.068 104.287,20.037 104.234,19.991 104.375,19.849 104.575,19.85 104.578,19.938 104.584,19.999 104.591,20.053 104.597,20.115 104.6,20.202
PHB on In1.Cu "In1.Cu-/CTRL/PHB" (solid, remove dead copper, pour order 30205): 101,19.379 100.997,19.242 100.991,19.145 100.983,19.06 100.977,18.963 100.974,18.826 101.274,18.825 101.487,19.038 101.406,19.11 101.34,19.162 101.291,19.212 101.26,19.278 101.25,19.379
+3V3 on In1.Cu "In1.Cu-+3V3" (solid, remove dead copper, pour order 30130): 98.891,18.959 98.993,19.045 99.076,19.093 99.153,19.128 99.236,19.176 99.337,19.263 99.126,19.476 98.913,19.687 98.826,19.586 98.778,19.503 98.743,19.426 98.695,19.343 98.609,19.241
I_SNS_A on In1.Cu "In1.Cu-/CTRL/I_SNS_A" (solid, remove dead copper, pour order 30275): 97.444,19.971 97.368,19.906 97.306,19.87 97.248,19.843 97.185,19.807 97.109,19.741 97.249,19.599 97.391,19.459 97.457,19.535 97.493,19.598 97.52,19.656 97.556,19.718 97.621,19.794
Net-(U4-BG_C) on In1.Cu "In1.Cu-Net-(U4-BG_C)" (solid, remove dead copper, pour order 30239): 102.505,31.239 102.444,31.169 102.409,31.114 102.383,31.062 102.348,31.006 102.288,30.937 102.499,30.724 102.8,30.725 102.791,30.786 102.772,30.833 102.757,30.873 102.757,30.911 102.787,30.956
PHC on In1.Cu "In1.Cu-/CTRL/PHC" (solid, remove dead copper, pour order 30272): 103.694,17.096 103.618,17.031 103.556,16.995 103.498,16.968 103.435,16.932 103.359,16.866 103.499,16.724 103.641,16.584 103.707,16.66 103.743,16.723 103.77,16.781 103.806,16.843 103.871,16.919
Net-(U4-BG_A) on In1.Cu "In1.Cu-Net-(U4-BG_A)" (solid, remove dead copper, pour order 30197): 97.325,32.1 97.326,32.198 97.331,32.268 97.343,32.328 97.365,32.394 97.402,32.485 97.125,32.601 96.848,32.485 96.885,32.394 96.907,32.328 96.919,32.268 96.924,32.198 96.925,32.1
Net-(Q5-Gate) on In1.Cu "In1.Cu-Net-(Q5-Gate)" (solid, remove dead copper, pour order 30303): 97.731,31.546 97.651,31.607 97.58,31.627 97.51,31.628 97.429,31.631 97.327,31.66 97.249,31.476 97.327,31.29 97.385,31.324 97.43,31.362 97.469,31.391 97.509,31.398 97.554,31.369
Net-(U4-TG_C) on In1.Cu "In1.Cu-Net-(U4-TG_C)" (solid, remove dead copper, pour order 30260): 103.125,17.75 103.117,17.65 103.099,17.58 103.076,17.52 103.058,17.45 103.05,17.35 103.25,17.349 103.45,17.35 103.442,17.45 103.424,17.52 103.401,17.58 103.383,17.65 103.375,17.75
Net-(U4-TG_B) on In1.Cu "In1.Cu-Net-(U4-TG_B)" (solid, remove dead copper, pour order 30263): 95.375,29.45 95.383,29.55 95.401,29.62 95.424,29.68 95.442,29.75 95.45,29.85 95.25,29.851 95.05,29.85 95.058,29.75 95.076,29.68 95.099,29.62 95.117,29.55 95.125,29.45
Net-(U4-BG_B) on In1.Cu "In1.Cu-Net-(U4-BG_B)" (solid, remove dead copper, pour order 30242): 104.55,32.225 104.547,32.158 104.538,32.111 104.522,32.071 104.501,32.027 104.473,31.965 104.75,31.849 105.027,31.965 104.999,32.027 104.978,32.071 104.962,32.111 104.953,32.158 104.95,32.225
VBUS on In1.Cu "In1.Cu-VBUS" (solid, remove dead copper, pour order 30091): 97.875,22.85 99.625,22.85 99.75,22.975 99.75,25.225 99.625,25.35 98.875,25.35 97.75,24.225 97.75,22.975
GND_C on In2.Cu "In2.Cu-/GND_C" (solid, remove dead copper, pour order 30079): 105.75,35.225 105.75,28.35 105.5,28.1 104,28.1 101.625,30.475 101.625,30.975 101.875,31.225 101.875,33.6 103.75,35.475 105.5,35.475
PHB on In2.Cu "In2.Cu-/CTRL/PHB" (solid, remove dead copper, pour order 30116): 101.625,39.975 101.625,31.35 101.25,30.975 100,30.975 99.75,31.225 99.75,34.6 98.375,35.975 98.375,39.975 98.5,40.1 101.5,40.1
GND_A on In2.Cu "In2.Cu-/GND_A" (solid, remove dead copper, pour order 30071): 94.5,36.225 94.25,35.975 94.25,26.35 94.5,26.1 94.75,26.1 95.625,26.975 95.625,34.35 95.875,34.6 95.875,35.975 95.625,36.225
PHC on In2.Cu "In2.Cu-/CTRL/PHC" (solid, remove dead copper, pour order 30124): 105.75,39.85 105.75,35.975 105.5,35.725 103.75,35.725 103,34.975 102.25,34.975 101.875,35.35 101.875,39.975 102,40.1 105.5,40.1
VBUS on In2.Cu "In2.Cu-VBUS-1" (solid, remove dead copper, pour order 30090): 100.75,25.475 102.75,23.475 105.5,23.475 105.75,23.225 105.75,5.35 105.5,5.1 102,5.1 101.75,5.35 101.75,8.475 99.75,10.475 99.75,16.35 97.625,18.475 97.625,24.1 99,25.475
GND on In2.Cu "In2.Cu-GND" (solid, remove dead copper, pour order 30315): 94.25,5.475 94.5,5.225 105.625,5.225 105.75,5.35 105.75,37.35 105.5,37.6 94.5,37.6 94.25,37.35
PHA on In2.Cu "In2.Cu-/CTRL/PHA" (solid, remove dead copper, pour order 30111): 98.125,39.975 98,40.1 95,40.1 94.25,39.35 94.25,36.725 94.5,36.475 95.75,36.475 96.125,36.1 96.125,35.1 96.375,34.85 97.125,34.85 98.125,35.85
VBUS on In2.Cu "In2.Cu-VBUS" (solid, remove dead copper, pour order 30089): 97.875,22.85 99.625,22.85 99.75,22.975 99.75,25.225 99.625,25.35 98.875,25.35 97.75,24.225 97.75,22.975
Net-(U4-BG_C) on In3.Cu "In3.Cu-Net-(U4-BG_C)-1" (solid, remove dead copper, pour order 30149): 103.987,15.061 104.072,14.968 104.12,14.892 104.15,14.819 104.178,14.73 104.223,14.61 104.501,14.724 104.615,15.002 104.495,15.047 104.406,15.075 104.333,15.105 104.257,15.153 104.164,15.238
PWM_IN-P on In3.Cu "In3.Cu-/CTRL/PWM_IN-P-1" (solid, remove dead copper, pour order 30159): 94.5,8.95 94.494,8.824 94.474,8.737 94.443,8.664 94.401,8.581 94.348,8.465 94.625,8.349 94.902,8.465 94.849,8.581 94.807,8.664 94.776,8.737 94.756,8.824 94.75,8.95
PWM_IN-P on In3.Cu "In3.Cu-/CTRL/PWM_IN-P" (solid, remove dead copper, pour order 30164): 97.775,16.725 97.901,16.719 97.988,16.699 98.061,16.668 98.144,16.626 98.26,16.573 98.376,16.85 98.26,17.127 98.144,17.074 98.061,17.032 97.988,17.001 97.901,16.981 97.775,16.975
PWM_IN-N on In3.Cu "In3.Cu-/CTRL/PWM_IN-N-1" (solid, remove dead copper, pour order 30139): 98.43,16.1 98.571,16.095 98.672,16.082 98.758,16.068 98.858,16.055 99,16.05 99.001,16.35 98.885,16.627 98.769,16.559 98.695,16.486 98.634,16.418 98.556,16.369 98.43,16.35
Net-(U4-BG_B) on In3.Cu "In3.Cu-Net-(U4-BG_B)-1" (solid, remove dead copper, pour order 30144): 104.112,15.936 104.197,15.843 104.245,15.767 104.275,15.694 104.303,15.605 104.348,15.485 104.626,15.599 104.74,15.877 104.62,15.922 104.531,15.95 104.458,15.98 104.382,16.028 104.289,16.113
+3V3 on In3.Cu "In3.Cu-+3V3-1" (solid, remove dead copper, pour order 30134): 95.033,15.416 94.919,15.317 94.828,15.26 94.743,15.218 94.651,15.161 94.538,15.062 94.749,14.849 94.962,14.638 95.061,14.751 95.118,14.843 95.16,14.928 95.217,15.019 95.316,15.133
Net-(U4-BG_B) on In3.Cu "In3.Cu-Net-(U4-BG_B)" (solid, remove dead copper, pour order 30169): 104.414,31.337 104.507,31.422 104.583,31.47 104.656,31.5 104.745,31.528 104.865,31.573 104.751,31.851 104.473,31.965 104.428,31.845 104.4,31.756 104.37,31.683 104.322,31.607 104.237,31.514
Net-(U4-BG_A) on In3.Cu "In3.Cu-Net-(U4-BG_A)-1" (solid, remove dead copper, pour order 30174): 97.638,32.264 97.553,32.357 97.505,32.433 97.475,32.506 97.447,32.595 97.402,32.715 97.124,32.601 97.01,32.323 97.13,32.278 97.219,32.25 97.292,32.22 97.368,32.172 97.461,32.087
PWM_IN-N on In3.Cu "In3.Cu-/CTRL/PWM_IN-N" (solid, remove dead copper, pour order 30184): 95.341,8.832 95.388,8.759 95.38,8.695 95.336,8.632 95.277,8.558 95.223,8.465 95.501,8.349 95.777,8.465 95.726,8.608 95.697,8.715 95.668,8.806 95.615,8.897 95.518,9.009
GND_C on In3.Cu "In3.Cu-/GND_C" (solid, remove dead copper, pour order 30078): 105.75,35.225 105.75,28.225 105.625,28.1 104,28.1 103.625,28.475 103.625,29.475 101.875,31.225 101.875,33.475 103.875,35.475 105.5,35.475
Net-(U4-BG_A) on In3.Cu "In3.Cu-Net-(U4-BG_A)" (solid, remove dead copper, pour order 30154): 103.5,14.325 103.494,14.199 103.474,14.112 103.443,14.039 103.401,13.956 103.348,13.84 103.625,13.724 103.902,13.84 103.849,13.956 103.807,14.039 103.776,14.112 103.756,14.199 103.75,14.325
Net-(U4-BG_C) on In3.Cu "In3.Cu-Net-(U4-BG_C)" (solid, remove dead copper, pour order 30179): 102.625,30.125 102.631,30.251 102.651,30.338 102.682,30.411 102.724,30.494 102.777,30.61 102.5,30.726 102.223,30.61 102.276,30.494 102.318,30.411 102.349,30.338 102.369,30.251 102.375,30.125
+3V3 on In3.Cu "In3.Cu-+3V3" (solid, remove dead copper, pour order 30129): 98.525,19.275 98.675,19.265 98.78,19.24 98.87,19.21 98.975,19.185 99.125,19.175 99.126,19.475 99.125,19.775 98.975,19.765 98.87,19.74 98.78,19.71 98.675,19.685 98.525,19.675
PHB on In3.Cu "In3.Cu-/CTRL/PHB" (solid, remove dead copper, pour order 30115): 101.625,39.975 101.625,31.35 101.25,30.975 100,30.975 99.75,31.225 99.75,34.6 98.375,35.975 98.375,39.975 98.5,40.1 101.5,40.1
GND_A on In3.Cu "In3.Cu-/GND_A" (solid, remove dead copper, pour order 30070): 94.5,36.225 94.25,35.975 94.25,26.35 94.5,26.1 94.75,26.1 95.625,26.975 95.625,34.35 95.875,34.6 95.875,35.975 95.625,36.225
PHC on In3.Cu "In3.Cu-/CTRL/PHC" (solid, remove dead copper, pour order 30123): 105.75,39.85 105.75,35.975 105.5,35.725 103.75,35.725 103,34.975 102.25,34.975 101.875,35.35 101.875,39.975 102,40.1 105.5,40.1
VBUS on In3.Cu "In3.Cu-VBUS-1" (solid, remove dead copper, pour order 30088): 101.75,5.35 102,5.1 105.5,5.1 105.75,5.35 105.75,23.1 105.5,23.35 103.75,23.35 103.5,23.1 103.5,9.1 101.75,7.35
GND on In3.Cu "In3.Cu-GND" (solid, remove dead copper, pour order 30316): 94.25,5.475 94.5,5.225 105.625,5.225 105.75,5.35 105.75,37.35 105.5,37.6 94.5,37.6 94.25,37.35
PHA on In3.Cu "In3.Cu-/CTRL/PHA" (solid, remove dead copper, pour order 30110): 98.125,39.975 98,40.1 95,40.1 94.25,39.35 94.25,36.725 94.5,36.475 95.75,36.475 96.125,36.1 96.125,35.1 96.375,34.85 97.125,34.85 98.125,35.85